# Altium PCB PCB2.PcbDoc
Units mil, origin at the board's own origin, x right, y up, seen from the top; angles counter-clockwise.
Board outline 3895 x 2865 mil, 4 copper layers (Top Layer, VCC, GND, Bottom Layer); 48 components, 105 nets, 303 pads, 159 vias.
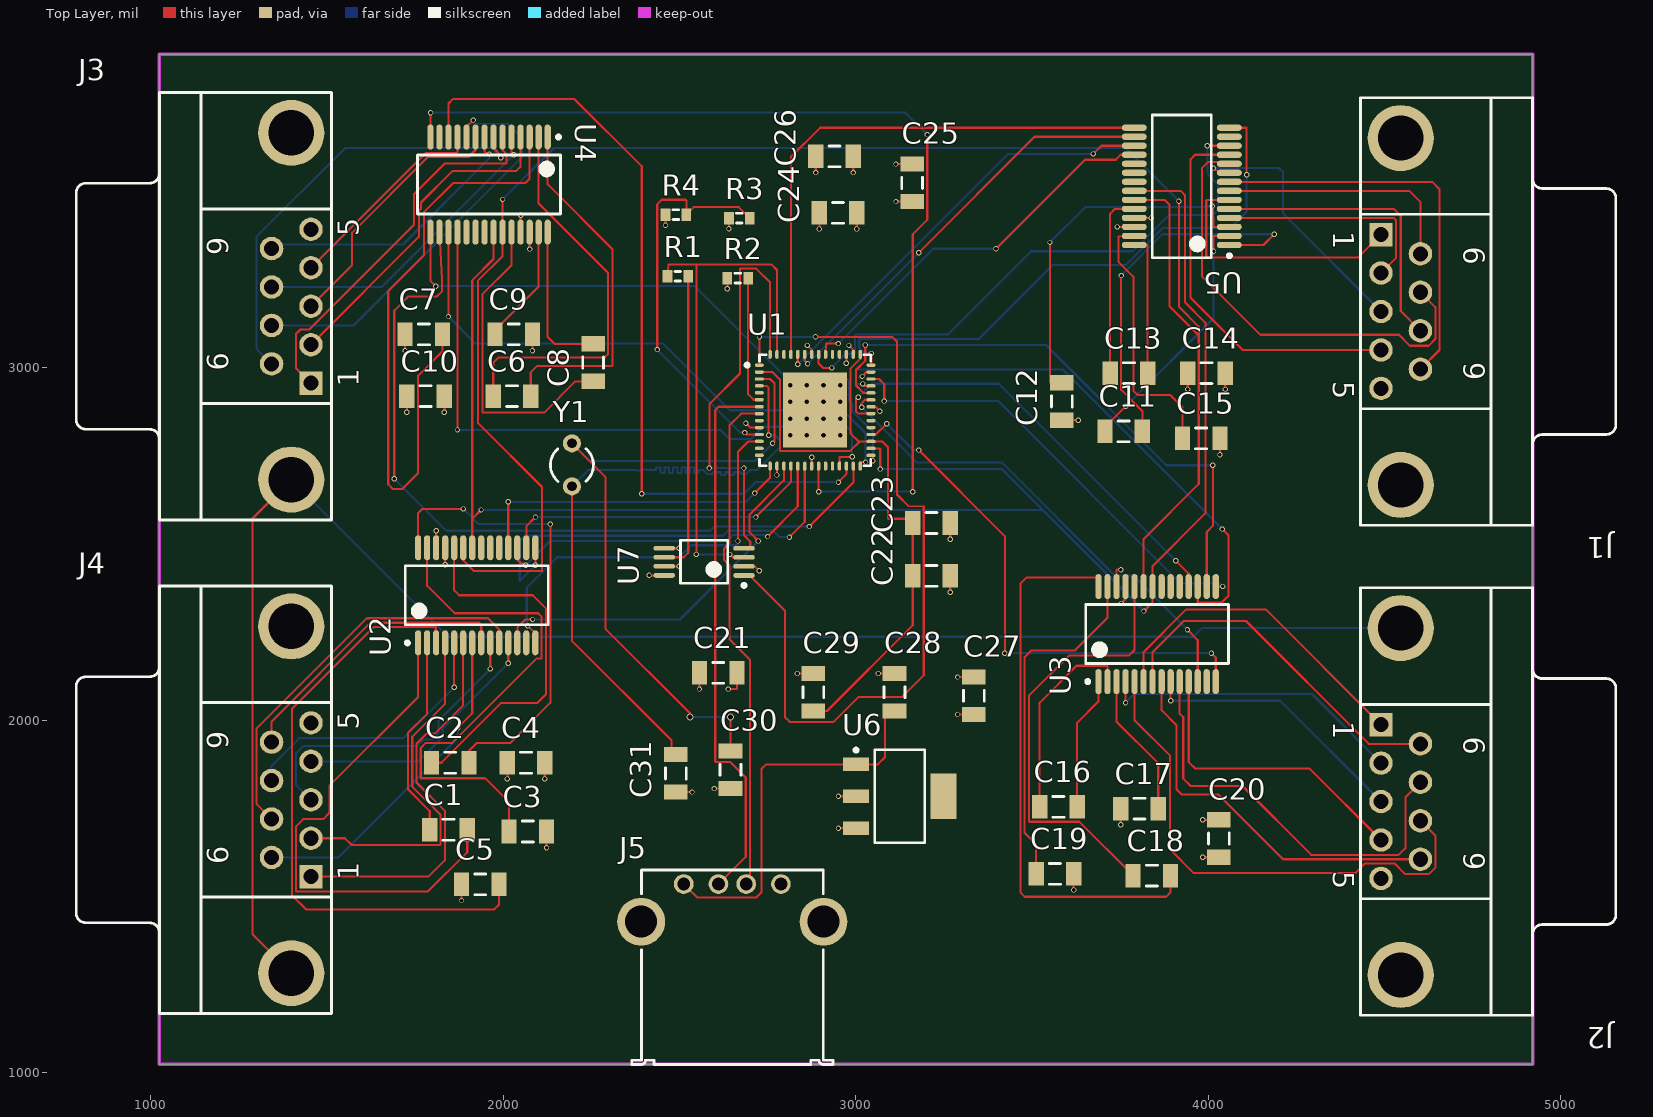
[diagram p0: Top Layer view]
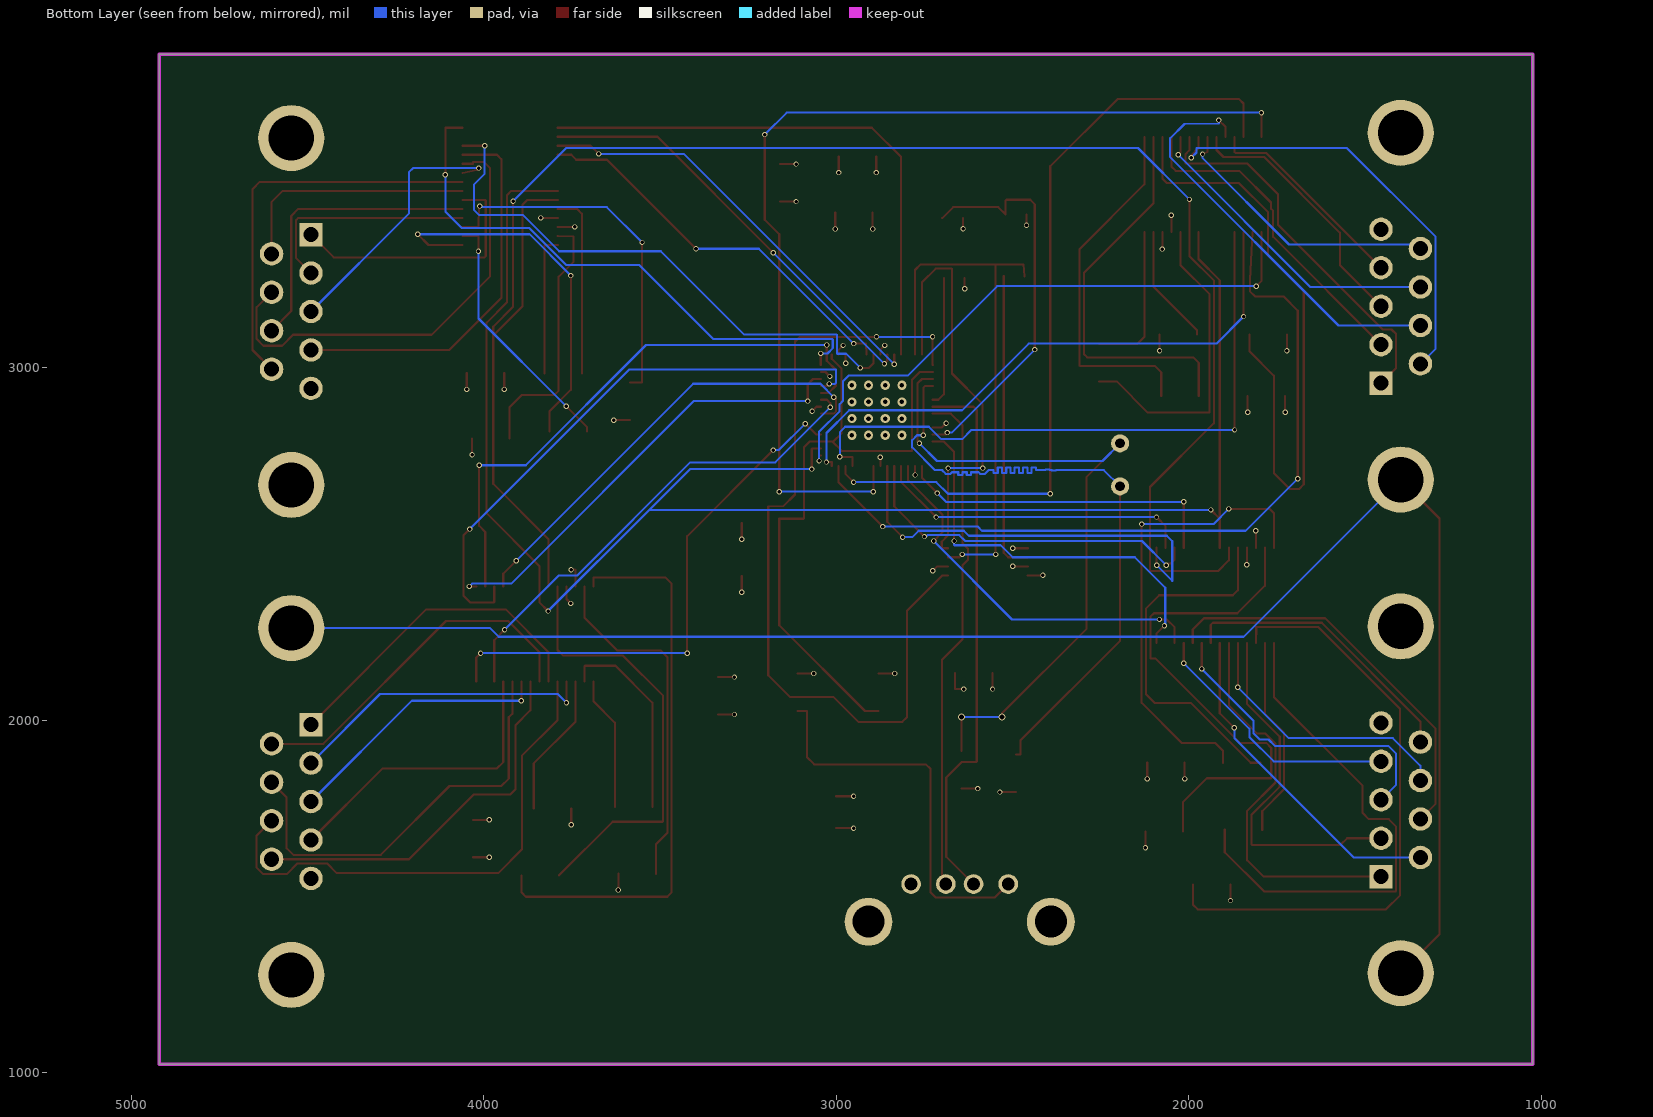
[diagram p1: Bottom Layer view, seen from below]
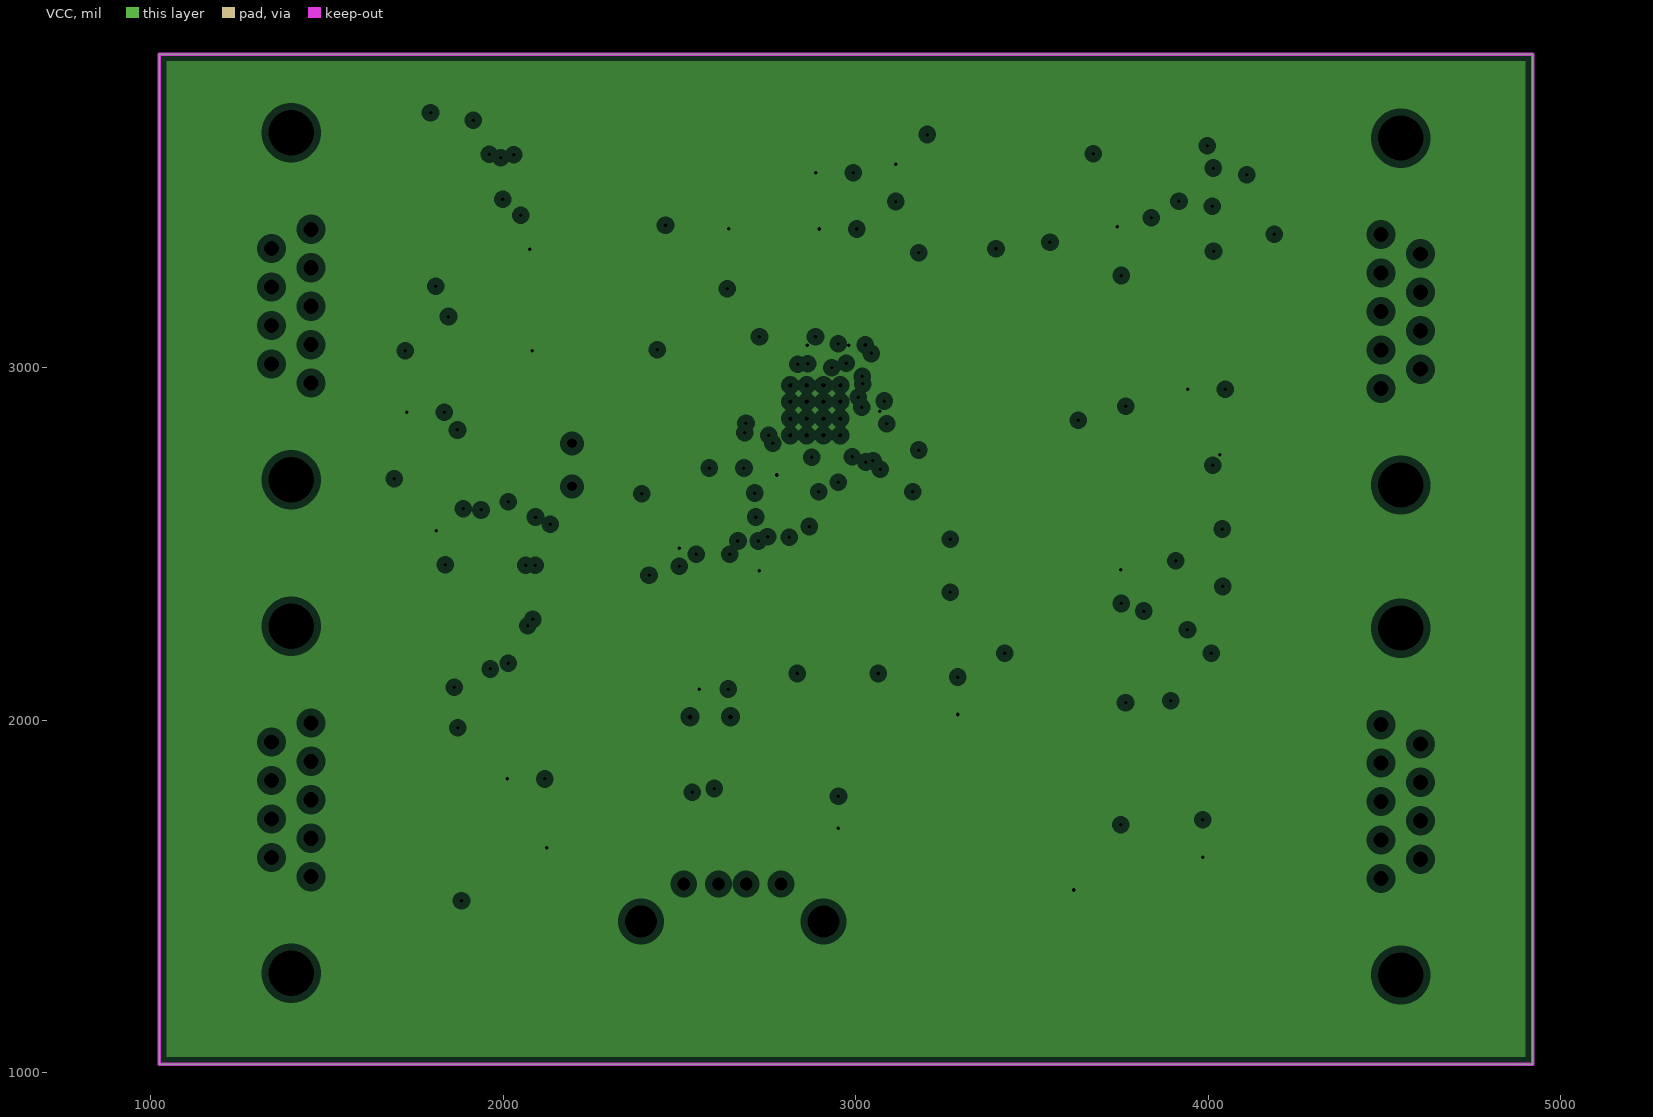
[diagram p2: VCC, clearances drawn from the general rule]
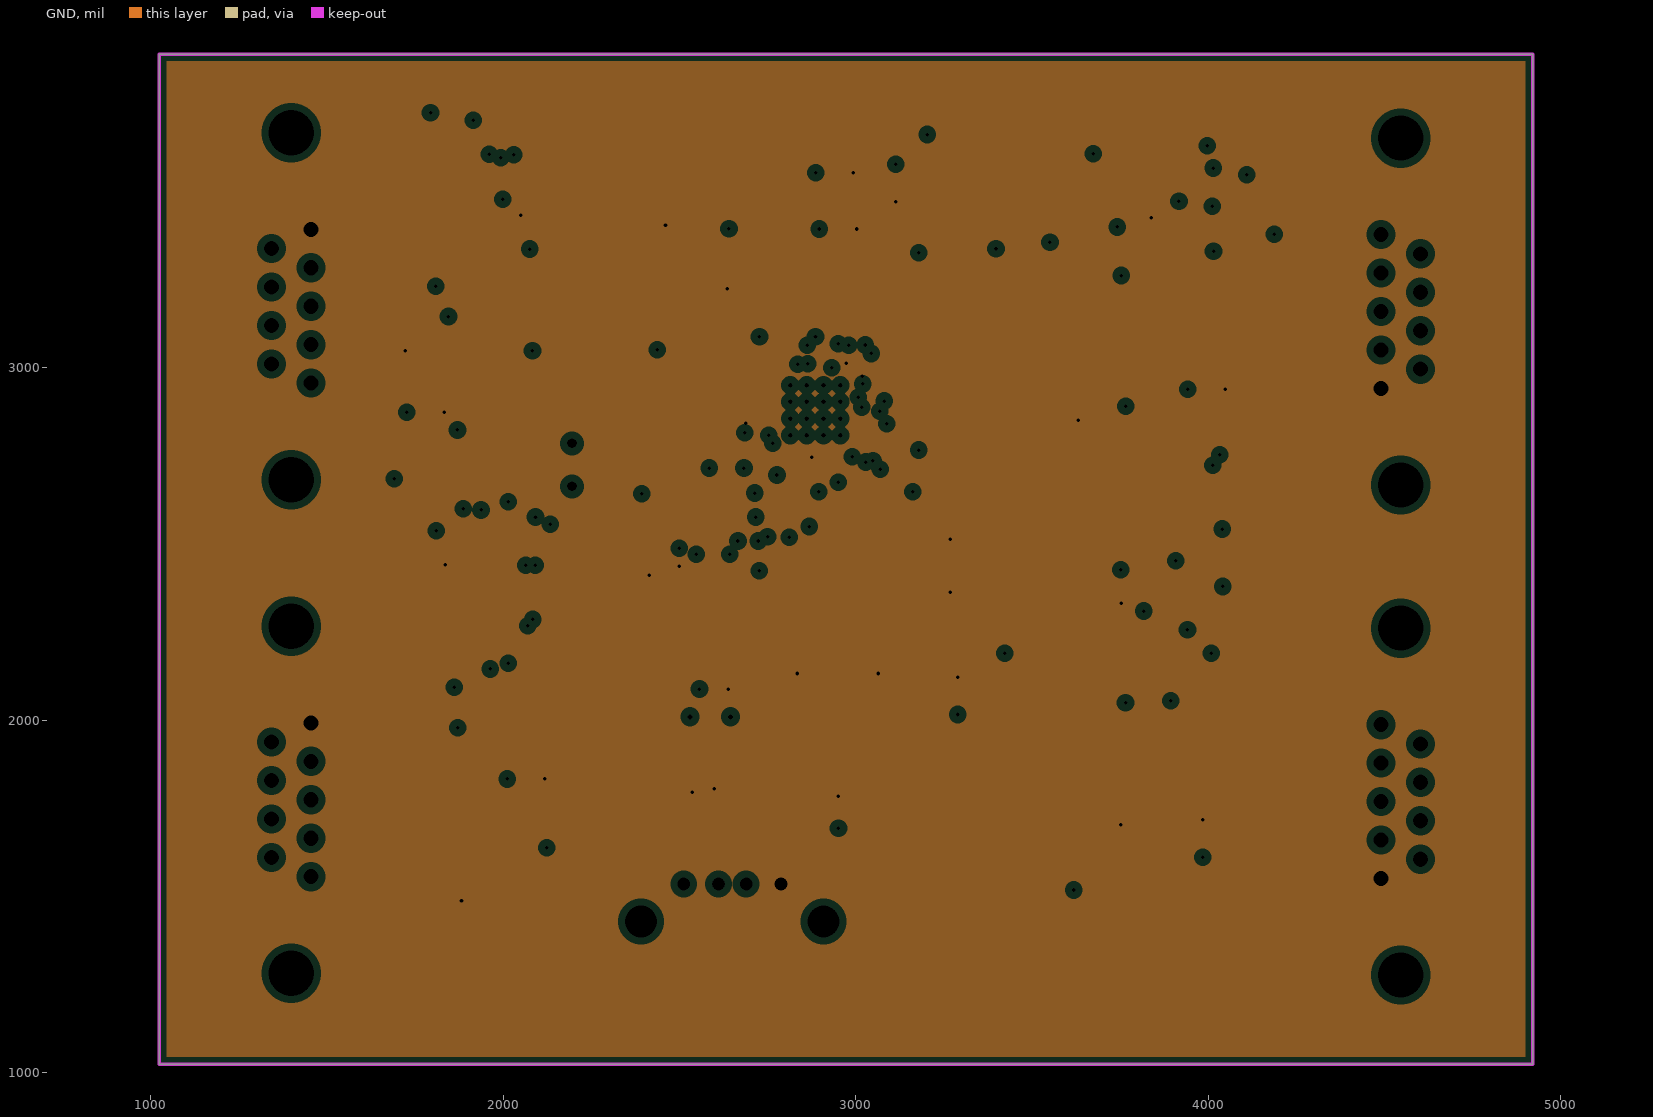
[diagram p3: GND, clearances drawn from the general rule]

## Layer stack, top to bottom
Top Layer: signal copper 1.4
Dielectric: core 12.6, FR-4, Dk 4.8
VCC: plane copper 20, net V3_3
Dielectric: prepreg 12.6, FR-4, Dk 4.8
GND: plane copper 20, net GND
Dielectric: core 12.6, FR-4, Dk 4.8
Bottom Layer: signal copper 1.4

## Board outline
1025,1025 1025,3890 4920,3890 4920,1025

## Design rules (kind name [scope] priority, off if disabled: settings)
Clearance [All] p1: gap=6
DiffPairsRouting [All] p1: maxlimit=50 minlimit=50 mostfreqgap=50 maxuncoupledlength=500
PlaneClearance [All] p1: clearance=20
PlaneConnect [All] p1: planeconnectstyle=Relief reliefexpansion=20 reliefentries=4 reliefconductorwidth=10 reliefairgap=10
PolygonConnect [All] p1: connectstyle=Relief reliefconductorwidth=10 reliefentries=4 polygonreliefangle="90 Angle" airgapwidth=10
RoutingVias [All] p1: holewidth=10 width=15 viastyle="Through Hole" minholewidth=10 minwidth=15 maxholewidth=15 maxwidth=20
SilkscreenOverComponentPads [All] p1: minsilkscreentomaskgap=10
SolderMaskExpansion [All] p1: expansion=4
Width [All] p1: maxlimit=6 minlimit=6 preferedwidth=6
24 further rules are at their usual default settings.

## Classes and differential pairs
differential pair OSC: +OSC_P -OSC_N

## Components (designator, comment, footprint, x,y, rotation, side; value= is the part's Value field where it differs from the comment)
C1 "Cap Semi" CAPC3216L 1845,1690 r0 top
C2 "Cap Semi" CAPC3216L 1850,1880 r0 top
C3 "Cap Semi" CAPC3216L 2070,1685 r0 top
C4 "Cap Semi" CAPC3216L 2065,1880 r0 top
C5 "Cap Semi" CAPC3216L 1935,1535 r0 top
C6 "Cap Semi" CAPC3216L 2025,2920 r0 top
C7 "Cap Semi" CAPC3216L 1775,3095 r0 top
C8 "Cap Semi" CAPC3216L 2255,3015 r90 top
C9 "Cap Semi" CAPC3216L 2030,3095 r0 top
C10 "Cap Semi" CAPC3216L 1780,2920 r0 top
C11 "Cap Semi" CAPC3216L 3760,2820 r0 top
C12 "Cap Semi" CAPC3216L 3585,2905 r90 top
C13 "Cap Semi" CAPC3216L 3775,2985 r0 top
C14 "Cap Semi" CAPC3216L 3995,2985 r0 top
C15 "Cap Semi" CAPC3216L 3980,2800 r0 top
C16 "Cap Semi" CAPC3216L 3575,1755 r0 top
C17 "Cap Semi" CAPC3216L 3805,1750 r0 top
C18 "Cap Semi" CAPC3216L 3840,1560 r0 top
C19 "Cap Semi" CAPC3216L 3565,1565 r0 top
C20 "Cap Semi" CAPC3216L 4030,1665 r90 top
C21 "Cap Semi" CAPC3216L 2610,2135 r0 top
C22 "Cap Semi" CAPC3216L 3215,2410 r180 top
C23 "Cap Semi" CAPC3216L 3215,2560 r180 top
C24 "Cap Semi" CAPC3216L 2950,3440 r180 top
C25 "Cap Semi" CAPC3216L 3160,3525 r90 top
C26 "Cap Semi" CAPC3216L 2940,3600 r180 top
C27 "Cap Semi" CAPC3216L 3335,2070 r90 top
C28 "Cap Semi" CAPC3216L 3110,2080 r90 top
C29 "Cap Semi" CAPC3216L 2880,2080 r90 top
C30 "Cap Semi" CAPC3216L 2645,1860 r90 top
C31 "Cap Semi" CAPC3216L 2490,1850 r90 top
J1 "D Connector 9" DSUB1.385-2H9 4920,3160 r270 top
J2 "D Connector 9" DSUB1.385-2H9 4920,1770 r270 top
J3 "D Connector 9" DSUB1.385-2H9 1025,3175 r90 top
J4 "D Connector 9" DSUB1.385-2H9 1025,1775 r90 top
J5 "61400416021" 61400416021 2650,1300 r0 top
R1 "Res3" RESC1608L 2495.47,3260 r0 top
R2 "Res3" RESC1608L 2665.47,3255 r0 top
R3 "Res3" RESC1608L 2670,3425 r0 top
R4 "Res3" RESC1608L 2490,3435 r0 top
U1 "FT4232H" QFN50P800X800X100-56N 2885,2880 r0 top
U2 "MAX3241" SOP65P780X199-28N 1925,2355 r90 top
U3 "MAX3241" SOP65P780X199-28N 3855,2245 r90 top
U4 "MAX3241" SOP65P780X199-28N 1960,3520 r270 top
U5 "MAX3241" SOP65P780X199-28N 3925,3515 r180 top
U6 "5 to 3_3 converter" SOT230P700X180-4N 3125,1785 r0 top
U7 "93LC46B" TSOP65P640X120-8N 2570,2450 r180 top
Y1 "XTAL" BCY-W2/D3.1 2195,2725 r0 top

## Footprints (in the part's own frame and the unit in brackets; to place one, negate y for a bottom-side part, rotate by r counter-clockwise, add the part's x,y. Pads: shape width x height; smd on the part's side, far side on the other; paste and mask are expansions set on the pad)
61400416021 [mm] "USB 2.0 Type A Horizontal"
  round 1.42 hole 0.92: 1(-3.5,5.99) 2(-1,5.99) 3(1,5.99) 4(3.5,5.99)
  round 3.45 hole 2.3: Shell(-6.57,3.28) Shell(6.57,3.28)
  silkscreen extent -7.25,-7 7.25,7, body extent -8,-7 8,7, height 7.63
BCY-W2/D3.1 [mm] "Crystal, Thru-Hole; 2 Leads; Body 3.1 x 8.2 mm (Dia.xH)"
  round 1.3 hole 0.7: 1(0,1.55) 2(0,-1.55)
  silkscreen extent -1.55,-1.19 1.55,1.17
CAPC3216L [mm] "Chip Capacitor, Body 3.2x1.6mm, IPC High Density"
  rect 1.1x1.7 smd: 1(-1.35,0) 2(1.35,0)
  silkscreen extent -0.4,-0.75 0.4,0.75, body extent -1.7,-0.9 1.7,0.9, height 1.3
DSUB1.385-2H9 [mm] "Connector; D Subminiature; 9 Position; Right Angle; Pitch 1.385 mm"
  rect 1.69x1.69 hole 1.09: 1(-5.54,-10.92)
  round 1.69 hole 1.09: 2(-2.77,-10.92) 3(0,-10.92) 4(2.77,-10.92) 5(5.54,-10.92) 6(-4.155,-8.08) 7(-1.385,-8.08) 8(1.385,-8.08) 9(4.155,-8.08)
  round 4.76 hole 3.26: 10(-12.495,-9.5) 11(12.495,-9.5)
  silkscreen extent -15.4,-12.4 15.4,6
QFN50P800X800X100-56N [mm] "QFN, 56-Leads, Body 8,0x8,0mm (max), Pitch 0,50mm, IPC Medium Density"
  oval 0.65x0.25 smd: 1(-4.025,3.25) 2(-4.025,2.75) 3(-4.025,2.25) 4(-4.025,1.75) 5(-4.025,1.25) 6(-4.025,0.75) 7(-4.025,0.25) 8(-4.025,-0.25) 9(-4.025,-0.75) 10(-4.025,-1.25) 11(-4.025,-1.75) 12(-4.025,-2.25) 13(-4.025,-2.75) 14(-4.025,-3.25) 29(4.025,-3.25) 30(4.025,-2.75) 31(4.025,-2.25) 32(4.025,-1.75) 33(4.025,-1.25) 34(4.025,-0.75) 35(4.025,-0.25) 36(4.025,0.25) 37(4.025,0.75) 38(4.025,1.25) 39(4.025,1.75) 40(4.025,2.25) 41(4.025,2.75) 42(4.025,3.25)
  oval 0.25x0.65 smd: 15(-3.25,-4.025) 16(-2.75,-4.025) 17(-2.25,-4.025) 18(-1.75,-4.025) 19(-1.25,-4.025) 20(-0.75,-4.025) 21(-0.25,-4.025) 22(0.25,-4.025) 23(0.75,-4.025) 24(1.25,-4.025) 25(1.75,-4.025) 26(2.25,-4.025) 27(2.75,-4.025) 28(3.25,-4.025) 43(3.25,4.025) 44(2.75,4.025) 45(2.25,4.025) 46(1.75,4.025) 47(1.25,4.025) 48(0.75,4.025) 49(0.25,4.025) 50(-0.25,4.025) 51(-0.75,4.025) 52(-1.25,4.025) 53(-1.75,4.025) 54(-2.25,4.025) 55(-2.75,4.025) 56(-3.25,4.025)
  rect 4.6x5.4 smd: 57(0,0)
  silkscreen extent -5.02,-4 4,4, body extent -4,-4 4,4, height 1
RESC1608L [mm] "Chip Resistor, Body 1.6x0.8mm, IPC High Density"
  rect 0.7x0.9 smd: 1(-0.75,0) 2(0.75,0)
  silkscreen extent -0.2,-0.35 0.2,0.35, body extent -0.85,-0.48 0.85,0.48, height 0.9
SOP65P780X199-28N [mm] "SOP, 28-Leads, Body 10,3x5,4mm (max), Pitch 0,65mm, IPC Medium Density"
  oval 1.8x0.45 smd: 1(-3.425,4.225) 2(-3.425,3.575) 3(-3.425,2.925) 4(-3.425,2.275) 5(-3.425,1.625) 6(-3.425,0.975) 7(-3.425,0.325) 8(-3.425,-0.325) 9(-3.425,-0.975) 10(-3.425,-1.625) 11(-3.425,-2.275) 12(-3.425,-2.925) 13(-3.425,-3.575) 14(-3.425,-4.225) 15(3.425,-4.225) 16(3.425,-3.575) 17(3.425,-2.925) 18(3.425,-2.275) 19(3.425,-1.625) 20(3.425,-0.975) 21(3.425,-0.325) 22(3.425,0.325) 23(3.425,0.975) 24(3.425,1.625) 25(3.425,2.275) 26(3.425,2.925) 27(3.425,3.575) 28(3.425,4.225)
  silkscreen extent -3.55,-5.15 2.13,5.15, body extent -2.69,-5.17 2.69,5.17, height 1.99
SOT230P700X180-4N [mm] "SOT223, 4-Leads, Body 6,7x7,3mm (max), Pitch 2,30mm, IPC Medium Density"
  rect 1.9x0.95 smd: 1(-3.15,2.3) 2(-3.15,0) 3(-3.15,-2.3)
  rect 1.9x3.3 smd: 4(3.15,0)
  silkscreen extent -3.27,-3.35 1.8,3.45, body extent -1.85,-3.35 1.85,3.35, height 1.8
TSOP65P640X120-8N [mm] "TSOP, 8-Leads, Body 3,1x4,5mm (max), Pitch 0,65mm, IPC Medium Density"
  oval 1.55x0.35 smd: 1(-2.875,0.975) 2(-2.875,0.325) 3(-2.875,-0.325) 4(-2.875,-0.975) 5(2.875,-0.975) 6(2.875,-0.325) 7(2.875,0.325) 8(2.875,0.975)
  silkscreen extent -3,-1.55 1.7,1.82, body extent -2.25,-1.55 2.25,1.55, height 1.2

## Part data
C1 C2 C3 C4 C5 C6 C7 C8 C9 C10 C11 C12 C13 C14 C15 C16 C17 C18 C19 C20 C21 C22 C23 C24 C25 C26 C27 C28 C29 C30 C31: "Capacitor (Semiconductor SIM Model)"
J1 J2 J3 J4: "Receptacle Assembly, 9 Position, Right Angle"
J5: "USB 2.0 Type A Receptacle WR-COM, Horizontal, THT"
R1 R2 R3 R4: "Resistor"
U1: library part Component_1
U2 U3 U4 U5: library part Component_2
U6: library part Component_3
U7: library part Component_4
Y1: "Crystal Oscillator"

## Via types
v1: diameter 15, hole 10, Top Layer to Bottom Layer, 141 vias
v2: diameter 25.98, hole 12.99, Top Layer to Bottom Layer, tented top, 16 vias
v3: diameter 20, hole 15, Top Layer to Bottom Layer, 2 vias

## Nets (pads, with @x,y where several pads share a name; then routed paths per layer and width w, separated by ;. In a path a pad name is that pad's centre, name@x,y a point inside that pad or via, vN(x,y) a via of type N, cw(c..) or ccw(c..) an arc to the next point about the centre after c; other vN are vias at no path point)
CTSA: J4.8 U2.5 | length 777.9
  Top Layer w6: v1(1861.02,2094.56) U2.5
  Bottom Layer w6: J4.8 1343.11,1871.61 1421.5,1950 1716.46,1950 v1(1861.02,2094.56)
CTSB: J3.8 U4.5 | length 895.5
  Top Layer w6: U4.5 2023.98,3610.48 v1(2030.23,3604.23)
  Bottom Layer w6: J3.8 1655.53,3229.53 v1(2030.23,3604.23)
CTSC: J2.8 U3.5 | length 1480.1
  Top Layer w6: U3.5 3791.02,2001 3892,1900.02 3892,1634 3959,1567 4417,1567 4444.16,1594.16 4528.84,1594.16 4559,1564 4625,1564 4645,1584 4645,1672.36 J2.8
CTSD: J1.8 U5.5 | length 843.1
  Top Layer w6: U5.5 4525.98,3451.02 4546,3431 4546,3161.36 J1.8
DCDA: J4.1 U2.6 | length 1117.3
  Top Layer w6: J4.1 1787.89,1556.89 1834.51,1603.51 1834.51,1743.69 1754.19,1824 1754.19,1934 1782.69,1962.5 1805.99,1962.5 1886.61,2043.12 U2.6
DCDB: J3.1 U4.6 | length 1085.3
  Top Layer w6: J3.1 1412,2999.81 1412,3096 1425,3109 1450,3109 1747,3406 1747,3493 1833.5,3579.5 2009,3579.5 2010,3605.39 1998.39,3617 U4.6
DCDC: J2.1 U3.6 | length 942.8
  Top Layer w6: U3.6 3816.61,2194 3937.61,2315 4163.19,2315 J2.1
DCDD: J1.1 U5.6 | length 747.9
  Top Layer w6: U5.6 3996,3476.61 3994.41,3475.02 3994.41,3317.12 3998,3313.53 4425.49,3313.53 J1.1
DSRA: J4.6 U2.7 | length 955.3
  Top Layer w6: v1(1871,1979.31) 1912.2,2020.51 U2.7
  Bottom Layer w6: J4.6 1532.27,1611.42 1871,1950.15 v1(1871,1979.31)
DSRB: J3.6 U4.7 | length 1261.2
  Top Layer w6: U4.7 1972.8,3623.69 1993,3603.49 v1(1993,3596)
  Bottom Layer w6: J3.6 1300,3054.53 1300,3372 1551.66,3623.66 1977,3623.66 1978.16,3622.5 1978.16,3610.84 v1(1993,3596)
DSRC: J2.6 U3.7 | length 1024.3
  Top Layer w6: U3.7 3842.2,2194 3930.2,2282 4107,2282 4455.42,1933.58 J2.6
DSRD: J1.6 U5.7 | length 702.4
  Top Layer w6: U5.7 4570.69,3502.2 4601.89,3471 J1.6
DTRA: J4.4 U2.11 | length 746.4
  Top Layer w6: v1(2014.57,2162.57) U2.11
  Bottom Layer w6: J4.4 1759.56,1884.06 1828.5,1953 1828.5,1976.5 v1(2014.57,2162.57)
DTRB: J3.4 U4.11 | length 593.9
  Top Layer w6: J3.4 1781,3610.14 1868.07,3610.14 1870.43,3612.5 U4.11
DTRC: J2.4 U3.11 | length 865.3
  Top Layer w6: U3.11 3944.57,1881.93 3962.5,1864 4287.02,1864 J2.4
DTRD: J1.4 U5.11 | length 1109.8
  Top Layer w6: U5.11 3962.5,3604.57 3950,3592.07 3950,3198.5 4097.55,3050.95 J1.4
EECLK: U1.56 U7.4 | length 1257.5
  Top Layer w6: v1(2585,2716) 2585,2897 2672,2984 2672,3280.72 2673,3281.72 2718,3281.72 2757.05,3242.67 U1.56 ; v1(2683,2716) 2683,2525 2701,2507 2701,2488.39 U7.4
  Bottom Layer w6: v1(2585,2716) v1(2683,2716)
EECS: U1.1 U7.1 | length 2392.1
  Top Layer w6: U7.1 2698.89,2411.61 2800,2310.5 2800,2008.5 2812.5,1996 2937.5,1996 3007.5,2066 3131,2066 3193,2128 3193,2607 3150,2608 3117,2641 3117,3075 3104,3088 v1(2886,3088) ; U1.1 2727,3007.95 v1(2727,3088)
  Bottom Layer w6: v1(2727,3088) v1(2886,3088)
EEDATA: R1.1 U1.55 U7.3 | length 1549.5
  Top Layer w6: R1.1 2468.66,3293.72 2547,3293.72 ; v1(2548,2471) 2548,3292.72 2547,3293.72 ; v1(2643,2471) 2651.2,2462.8 U7.3 ; U1.55 2776.73,3277.77 2760.78,3293.72 2547,3293.72
  Bottom Layer w6: v1(2548,2471) v1(2643,2471)
GND: C4.2 C5.1 C7.1 C10.2 C12.1 C14.2 C17.1 C20.2 C21.2 C22.1 C23.1 C24.1 C25.1 C26.1 C27.2 C28.2 C29.2 C30.1 C31.1 J1.5 J2.5 J3.5 J4.5 J5.4 R2.1 R4.1 U1.10 U1.21 U1.41 U1.45 U2.25 U3.25 U4.25 U5.25 U6.2 U7.7 U7.8 | length 1415
  Top Layer w6: v1(1721.85,3049.03) C7.1 ; v1(1833.15,2874.03) C10.2 ; v1(1835.43,2441.91) U2.25 ; v1(1881.85,1489.03) C5.1 ; U4.25 v1(2049.57,3433.09) ; v1(2118.15,1834.03) C4.2 ; v1(2413.8,2411.61) U7.8 ; U7.7 v1(2499.82,2437.2) ; v1(2460.47,3404.78) R4.1 ; C31.1 v1(2535.97,1796.85) ; v1(2599.03,1806.85) C30.1 ; v1(2635.94,3224.78) R2.1 ; v1(2638.15,2089.03) 2662,2089.03 2663.15,2090.18 C21.2 ; v1(2688.74,2843.29) 2701.24,2830.79 U1.10 ; v1(2834.03,2133.15) C29.2 ; U1.21 v1(2875.16,2746.83) ; v1(2951.08,1785) U6.2 ; v1(2973.58,3013.17) U1.45 ; v1(2993.15,3554.03) C26.1 ; v1(3003.15,3394.03) C24.1 ; v1(3018.17,2975.77) 3030.67,2988.27 U1.41 ; v1(3064.03,2133.15) C28.2 ; v1(3114.03,3471.85) C25.1 ; v1(3268.15,2364.03) C22.1 ; v1(3268.15,2514.03) C23.1 ; v1(3289.03,2123.15) C27.2 ; C12.1 v1(3630.97,2851.85) ; v1(3751.85,1704.03) C17.1 ; v1(3752.93,2331.91) 3765.43,2344.41 U3.25 ; U5.25 v1(3838.09,3425.43) ; v1(3984.03,1718.15) C20.2 ; v1(4048.15,2939.03) C14.2
NetC1_1: C1.1 U2.2 | length 578.1
  Top Layer w6: U2.2 1784.25,2018.85 1730.19,1964.8 1730.19,1804.36 1791.85,1742.71 C1.1
NetC1_2: C1.2 U2.1 | length 1476.7
  Top Layer w6: U2.1 1758.66,2066 1507,1814.34 1507,1737.5 1489.5,1720 1433,1720 1412.65,1699.65 1412.65,1515.97 1414,1514.62 1786.62,1514.62 1898.15,1626.15 C1.2
NetC2_1: C2.1 U2.24 | length 1050.9
  Top Layer w6: C2.1 1824.66,1880 1994.66,2050 2097.5,2050 2121.2,2073.7 2121.2,2317.8 2084,2355 1875,2355 1861.02,2368.98 U2.24
NetC2_2: C2.2 U2.28 | length 1324.3
  Top Layer w6: U2.28 1758.66,2587.5 1771.16,2600 v1(1887,2600) ; C2.2 1903.15,1914.15 1925,1936 2020,1936 2134,2050 v1(2134,2557)
  Bottom Layer w6: v1(1887,2600) 1930,2557 v1(2134,2557)
NetC3_1: C3.1 U2.27 | length 1481.9
  Top Layer w6: U2.27 1784.25,2382.25 1862.5,2304 2099,2304 2109.2,2293.8 2109.2,2177 2108.2,2176 2095.54,2176 1855.82,1936.27 1780.47,1936.27 1766.19,1922 1766.19,1837 1767.19,1836 1949,1836 2016.85,1768.15 C3.1
NetC5_2: C5.2 U2.3 | length 1745.3
  Top Layer w6: U2.3 1808.84,2265 1633,2265 1400.65,2032.65 1400.65,1503.97 1440.62,1464 1975,1464 1988.15,1477.15 C5.2
NetC6_1: C6.1 U4.2 | length 1127.5
  Top Layer w6: C6.1 1971.85,3014.35 1987.5,3030 2288.51,3030 2297.47,3038.96 2297.47,3269.53 2100.75,3466.25 U4.2
NetC6_2: C6.2 U4.1 | length 1031.3
  Top Layer w6: C6.2 2078.15,2987.5 2095.65,3005 2308,3005 2310,3007 2310,3337 2126.34,3520.66 U4.1
NetC7_2: C7.2 U4.3 | length 1802.3
  Top Layer w6: C7.2 1828.15,3047 1759,2977.85 1759,2702 1713,2656 1687.5,2656 1674,2669.5 1674,3218 1775,3319 1775,3441.14 1858.52,3524.66 2062.5,3524.66 2075.16,3537.32 U4.3
NetC8_1: C8.1 U4.24 | length 896.7
  Top Layer w6: U4.24 2023.98,3292 1941,3209.02 1941,2874 1942,2873 2116.15,2873 2205,2961.85 C8.1
NetC8_2: C8.2 U4.28 | length 434.3
  Top Layer w6: U4.28 2126.34,3087.5 2145.69,3068.15 C8.2
NetC9_1: C9.1 U4.27 | length 341.5
  Top Layer w6: C9.1 1976.85,3107 2100.75,3230.9 U4.27
NetC11_1: C11.1 U5.2 | length 726.1
  Top Layer w6: C11.1 3706.85,2832 v1(3765.96,2891.11) ; v1(4015,3331) 4015,3373.25 4016,3374.25 U5.2
  Bottom Layer w6: v1(3765.96,2891.11) 4015,3140.15 v1(4015,3331)
NetC11_2: C11.2 U5.1 | length 1089.1
  Top Layer w6: v1(3753,3262) 3753,2938 3813.15,2877.85 C11.2 ; U5.1 4156.66,3348.66 v1(4187,3379)
  Bottom Layer w6: v1(3753,3262) 3870,3379 v1(4187,3379)
NetC12_2: C12.2 U5.3 | length 1039.3
  Top Layer w6: v1(3551,3356) 3551,2958.65 C12.2 ; v1(4011,3459) 4014,3456 4015,3399.84 U5.3
  Bottom Layer w6: v1(3551,3356) 3651,3456 4008,3456 v1(4011,3459)
NetC13_1: C13.1 U5.24 | length 526.4
  Top Layer w6: C13.1 3721.85,3437.5 3735.37,3451.02 U5.24
NetC13_2: C13.2 U5.28 | length 401
  Top Layer w6: U5.28 3827,3348.66 3828.15,3347.51 C13.2
NetC15_1: C15.1 U5.27 | length 747.9
  Top Layer w6: U5.27 3745,3373.25 3745,3301 3787.5,3258.5 3787.5,2935.5 3800,2923 3892.5,2923 3926.85,2888.65 C15.1
NetC16_1: C16.1 U3.2 | length 575.5
  Top Layer w6: C16.1 3521.85,2050.64 3626.21,2155 3713.25,2155 3714.25,2154 U3.2
NetC16_2: C16.2 U3.1 | length 380.2
  Top Layer w6: C16.2 3628.15,1993.49 3688.66,2054 U3.1
NetC17_2: C17.2 U3.3 | length 409.2
  Top Layer w6: U3.3 3739.84,1996.59 3858.15,1878.28 C17.2
NetC18_1: C18.1 U3.24 | length 1249
  Top Layer w6: C18.1 3634.32,1712.53 3492.66,1712.53 3491.19,1714 3491.19,2070.12 3605.07,2184 3775.02,2184 3791.02,2200 U3.24
NetC18_2: C18.2 U3.28 | length 1614.5
  Top Layer w6: U3.28 3688.66,2406 3485.5,2406 3467,2387.5 3467,1512.5 3479.5,1500 3880.65,1500 3893.15,1512.5 C18.2
NetC19_1: C19.1 U3.27 | length 998.3
  Top Layer w6: C19.1 3511.85,1648.15 3479.19,1680.81 3479.19,2179.89 3497.73,2198.43 3621.68,2198.43 3714.25,2291 U3.27
NetC28_1: C28.1 J5.1 U6.1 | length 1114.2
  Top Layer w6: J5.1 2550.03,1498 2718.5,1498 2733,1512.5 2733,1862.5 2746.05,1875.55 U6.1 3062.5,1875.55 3083,1896.05 3083,2026.85 C28.1
NetJ5_2: J5.2 U1.7 | length 1565.2
  Top Layer w6: J5.2 2688,1613.2 2688,1838 2644,1882 2603,1882 2601.68,1883.32 2601.68,2880.52 2611,2889.84 U1.7
NetJ5_3: J5.3 U1.8 | length 1440.7
  Top Layer w6: J5.3 2700,1546.46 2700,2172 2642,2230 2642,2440.34 2626.5,2455.84 2626.5,2487.5 2642,2503 2642,2836.91 2675.25,2870.16 U1.8
NetR1_2: R1.2 U7.6 | length 858.1
  Top Layer w6: U7.6 2512.5,2462.8 2525,2475.3 R1.2
NetR2_2: R2.2 U1.6 | length 367.9
  Top Layer w6: R2.2 2695,2925 2710.47,2909.53 U1.6
NetR3_2: R3.2 R4.2 U1.11 | length 1131.6
  Top Layer w6: v1(2437,3052) 2437,3464 2450,3477 2517.53,3477 2519.53,3475 R4.2 2540.53,3456 2668.53,3456 R3.2 ; v1(2685,2816.5) 2690.4,2811.1 U1.11
  Bottom Layer w6: v1(2437,3052) 2672.5,2816.5 v1(2685,2816.5)
OSC_N: C31.2 U1.4 Y1.2 | length 1957.7
  Top Layer w6: Y1.2 2195,2226 2478,1943 2478,1903.15 C31.2 ; U1.4 2748,2948.9 2753,2943.9 v1(2753,2809)
  Bottom Layer w6: Y1.2 2241.02,2710 2295,2710 2300,2710 2312,2710.01 2324,2710 2330,2710 2340,2710 2352,2710.01 2364,2710 2370,2710 2377,2710 2377,2709.5 2389,2709.5 2389,2710 2395,2710 2395,2712 2407,2712 2407,2710 2419,2710 2425,2710 2434,2710 2434,2718 2446,2718 2446,2710 2446,2702 2458,2702 2458,2710 2458,2718 2470,2718 2470,2710 2470,2702 2482,2702 2482,2710 2482,2718 2494,2718 2494,2710 2494,2702 2506,2702 2506,2710 2506,2718 2518,2718 2518,2710 2518,2702 2530,2702 2530,2710 2530,2718 2542,2718 2542,2710 2542,2702 2554,2702 2554,2710 2560,2710 2568.5,2710 2568.5,2709.17 2578.17,2699.5 2591.83,2699.5 2596.33,2704 2606,2704 2618,2704 2618,2696 2630,2696 2630,2704 2642,2704 2642,2696 2654,2696 2654,2704 2660,2704 2671.67,2704 2676.17,2699.5 2689.83,2699.5 2699.5,2709.17 2699.5,2710 2720,2710 2785,2775 2785,2795 2771,2809 v1(2753,2809)
OSC_P: C30.2 U1.3 Y1.1 | length 1957.7
  Top Layer w6: Y1.1 2290,2691.02 2290,2260 2530,2020 v3(2530,2010) ; C30.2 v3(2645,2010) ; U1.3 2757,2968.58 2769.5,2956.08 2769.5,2791.27 v1(2764.26,2786.02)
  Bottom Layer w6: Y1.1 2245.02,2736 2295,2736 2300,2736 2352,2736 2364,2736 2568.5,2736 2714.23,2736 v1(2764.26,2786.02) ; v3(2530,2010) v3(2645,2010)
PWREN#: U2.23 U3.23 U4.23 U5.23 | length 5162.2
  Top Layer w6: U2.23 1886.61,2454.39 1917.5,2423.5 2109,2423.5 2110,2424.5 2110,2662 1929,2843 1929,3248.23 1998.39,3317.62 U4.23 v1(1998.39,3477.9) ; U5.23 3875.89,3476.61 3890,3462.5 3890,3175 3973,3092 ; U3.23 3816.61,2514.61 3973,2671 3973,3092 ; v1(3917,3473) 3917,3173 3973,3117 3973,3092
  Bottom Layer w6: v1(1998.39,3477.9) 2144.1,3623.62 3766.38,3623.62 v1(3917,3473)
RIA: J4.9 U2.8 | length 822.6
  Top Layer w6: J4.9 1343.11,1997.11 1623,2277 1931.93,2277 1937.8,2271.14 U2.8
RIB: J3.9 U4.8 | length 793.3
  Top Layer w6: U4.8 1947.2,3612 v1(1961,3606.5)
  Bottom Layer w6: J3.9 1354.53,3350 1716,3350 1961,3595 v1(1961,3606.5)
RIC: J2.9 U3.8 | length 1096.8
  Top Layer w6: U3.8 3867.8,2029 3910,1986.8 3910,1805 3925,1790 4028.42,1790 4212,1606.42 J2.9
RID: J1.9 U5.8 | length 1137.9
  Top Layer w6: U5.8 4635.2,3527.8 4656.16,3506.84 4656.16,3050.69 J1.9
RTSA: J4.7 U2.10 | length 1143.3
  Top Layer w6: J4.7 1300.84,1762.74 1300.84,1977.57 1613.27,2290 1957,2290 1988.98,2258.02 U2.10
RTSB: J3.7 U4.10 | length 1182
  Top Layer w6: U4.10 1896.02,3684.02 v1(1915,3703)
  Bottom Layer w6: J3.7 1575.47,3120.47 2052.98,3597.98 2052.98,3651.52 2012.5,3692 1915,3693 v1(1915,3703)
RTSC: J2.7 U3.10 | length 1211.5
  Top Layer w6: U3.10 3918.98,2019 3929,2008.98 3929,1835 3950,1814 4097,1814 4292.32,1618.68 4540.18,1618.68 4559,1637.5 4559,1781.64 J2.7
RTSD: J1.7 U5.10 | length 1298.1
  Top Layer w6: U5.10 4030.41,3578.98 4030.41,3583.82 3999,3583.82 3982,3566.82 3982,3260 4148,3094 4541,3094 4572,3063 4625,3063 4644.16,3082.16 4644.16,3172.26 J1.7
RXDA: J4.2 U2.4 | length 1019.3
  Top Layer w6: J4.2 1551.06,1665.94 1570,1647 1820.51,1647 1822.51,1649 1822.51,1732 1742.19,1812.31 1742.19,1953.87 1835.43,2047.11 U2.4
RXDB: J3.2 U4.4 | length 941
  Top Layer w6: J3.2 1761,3372.02 1761,3445.7 1767,3451.7 1767,3469.2 1856.86,3559.05 2037.5,3559.05 2049.57,3571.12 U4.4
RXDC: J2.2 U3.4 | length 876.3
  Top Layer w6: v1(3765.43,2050) U3.4
  Bottom Layer w6: v1(3765.43,2050) 3790.43,2075 4294.13,2075 J2.2
RXDD: J1.2 U5.4 | length 642.6
  Top Layer w6: U5.4 4525.94,3425.43 4532.35,3419.03 4532.35,3311.32 J1.2
SHIELD: J2.10 J3.10 J4.10 | length 4832.9
  Top Layer w6: J4.10 1288.84,1393.24 1288.84,2572.9 J3.10
  Bottom Layer w6: J3.10 1844.59,2237.5 3957.5,2237.5 3981.93,2261.93 J2.10
SUSPEND#: U1.30 U2.22 U3.22 U4.22 U5.22 | length 4972.9
  Top Layer w6: U2.22 1912.2,2572 ; v1(1937.2,2597) 1912.2,2572 ; U4.22 1972.8,3309 1912.2,3248.41 1912.2,2572 ; U1.30 3068.03,2771.73 3069.76,2770 v1(3069.76,2713) ; U5.22 3921.8,3502.2 3934,3490 3934,3186 3992,3128 3992,2587.8 3842.2,2438 U3.22 3842.2,2335 v1(3817.6,2310.4)
  Bottom Layer w6: v1(1937.2,2597) 3531,2597 ; v1(3069.76,2713) 3415,2713 3531,2597 ; v1(3817.6,2310.4) 3531,2597
TTL_CTSA: U1.15 U2.18 | length 934.3
  Top Layer w6: U2.18 v1(2014.57,2620) ; v1(2714,2645) 2757.05,2688.05 U1.15
  Bottom Layer w6: v1(2014.57,2620) 2689,2620 v1(2714,2645)
TTL_CTSB: U1.25 U4.18 | length 1843.8
  Top Layer w6: v1(1870.43,2824) U4.18 ; U1.25 2953.9,2747 v1(2990,2748)
  Bottom Layer w6: v1(1870.43,2824) 2617,2824 2642.98,2798.02 2702.52,2798.02 2737.5,2833 2975,2833 2990,2818 v1(2990,2748)
TTL_CTSC: U1.35 U3.18 | length 1301.7
  Top Layer w6: v1(3007,2917) 3000.5,2910.5 3000.5,2876.66 3007,2870.16 U1.35 ; v1(3908,2453) 3944.57,2416.43 U3.18
  Bottom Layer w6: v1(3007,2917) 3045,2955 3406,2955 v1(3908,2453)
TTL_CTSD: U1.48 U5.18 | length 1127
  Top Layer w6: U1.48 2915.53,3069 v1(2950.5,3069) ; v1(3398,3338) 3650.5,3590.5 3737.68,3590.5 3751.75,3604.57 U5.18
  Bottom Layer w6: v1(2950.5,3069) 3219.5,3338 v1(3398,3338)
TTL_DCDA: U1.19 U2.17 | length 1023
  Top Layer w6: U2.17 2040.16,2456 2050.75,2445.41 2058.59,2445.41 v1(2064,2440) ; v1(2750,2521.5) 2835.79,2607.29 U1.19
  Bottom Layer w6: v1(2064,2440) 2133,2509 2634.5,2509 2651,2525.5 2740.5,2525.5 2744.5,2521.5 v1(2750,2521.5)
TTL_DCDB: U1.28 U4.17 | length 1668.4
  Top Layer w6: v1(1844.84,3145.66) U4.17 ; U1.28 3012.95,2733 v1(3028,2733)
  Bottom Layer w6: v1(1844.84,3145.66) 1921.5,3069 2454,3069 2643,2880 2963.5,2880 3028,2815.5 v1(3028,2733)
TTL_DCDC: U1.39 U3.17 | length 1645.6
  Top Layer w6: v1(3020,2954.5) 3025.6,2948.9 U1.39 ; U3.17 3970.16,2336 3971.16,2335 4039,2335 4057.5,2353.5 4057.5,2525.5 v1(4040,2543)
  Bottom Layer w6: v1(3020,2954.5) 3004.42,2954.5 3001,2957.92 3001,2994.5 3002,2995.5 3587.5,2995.5 v1(4040,2543)
TTL_DCDD: U1.52 U5.17 | length 1239.7
  Top Layer w6: v1(2835.79,3010) U1.52 ; v1(3674,3607) 3697.16,3630.16 U5.17
  Bottom Layer w6: v1(2835.79,3010) 3432.79,3607 v1(3674,3607)
TTL_DSRA: U1.18 U2.16 | length 908.8
  Top Layer w6: U2.16 2065.75,2551 v1(2091.75,2577) ; v1(2717,2577) 2816.1,2676.1 U1.18
  Bottom Layer w6: v1(2091.75,2577) v1(2717,2577)
TTL_DSRB: U1.27 U4.16 | length 2269.7
  Top Layer w6: v1(1691,2686) 1691,3162.5 1731.5,3203 1812.5,3203 1826,3216.5 1826,3249.25 U4.16 ; v1(2868.5,2550) 2993.27,2674.77 U1.27
  Bottom Layer w6: v1(1691,2686) 1839,2538 2587,2538 2599,2550 v1(2868.5,2550)
TTL_DSRC: U1.38 U3.16 | length 1655.4
  Top Layer w6: v1(3027,3065) 3027,3020 3001,2994 3001,2950 3021.79,2929.21 U1.38 ; U3.16 3995.75,2534.75 4013,2552 v1(4013,2724)
  Bottom Layer w6: v1(3027,3065) 3540,3065 3881,2724 v1(4013,2724)
TTL_DSRD: U1.51 U5.16 | length 1223.1
  Top Layer w6: U1.51 2855.47,3020.06 v1(2863.53,3012) ; v1(3178.53,3327) 3507.28,3655.75 U5.16
  Bottom Layer w6: v1(2863.53,3012) v1(3178.53,3327)
TTL_DTRA: U1.17 U2.12 | length 1092.4
  Top Layer w6: U2.12 2040.16,2264 2062.66,2286.5 v1(2083.5,2286.5) ; v1(2724,2509) 2699,2534 2699,2584 2796.42,2681.42 U1.17
  Bottom Layer w6: v1(2083.5,2286.5) 2501.5,2286.5 v1(2724,2509)
TTL_DTRB: U1.26 U4.12 | length 2283
  Top Layer w6: U4.12 1844.84,3750 1857.34,3762.5 2202.5,3762.5 2393,3572 v1(2393,2643) ; v1(2951,2676) 2973.58,2698.58 U1.26
  Bottom Layer w6: v1(2393,2643) 2683,2643 2716,2676 v1(2951,2676)
TTL_DTRC: U1.37 U3.12 | length 1386.7
  Top Layer w6: v1(3017,2888) 3017,2900 3026.53,2909.53 U1.37 ; v1(3941,2257) 3970.16,2227.84 U3.12
  Bottom Layer w6: v1(3017,2888) 3173,2732 3414,2732 3735,2411 3787,2411 v1(3941,2257)
TTL_DTRD: U1.49 U5.12 | length 1637.3
  Top Layer w6: U1.49 2894.84,3012.5 2907.34,3000 v1(2932,3000) ; v1(3997.41,3630.16) U5.12
  Bottom Layer w6: v1(2932,3000) 2972,3040 2997,3040 2998,3041 2998,3093.52 2999,3094.52 3261.52,3094.52 3498,3331 3786,3331 3888.5,3433.5 4012.5,3433.5 4028,3449 4028,3519.91 3997.41,3550.5 v1(3997.41,3630.16)
TTL_RIA: U1.20 U2.15 | length 1228.9
  Top Layer w6: v1(2091.34,2440.34) U2.15 ; v1(2812,2520) 2855.47,2563.47 U1.20
  Bottom Layer w6: v1(2091.34,2440.34) 2047,2396 2047,2508.5 2062.5,2524 2624,2524 2638,2538 2766.5,2538 2784.5,2520 v1(2812,2520)
TTL_RIB: U1.29 U4.15 | length 1719.4
  Top Layer w6: U4.15 1793.66,3247.34 v1(1809,3232) ; U1.29 3049,2752.05 v1(3049,2736)
  Bottom Layer w6: v1(1809,3232) 2543.49,3232 2797.49,2978 2965.5,2978 2981,2962.5 2981,2906.5 2990.5,2897 2990.5,2877 3049,2818.5 v1(3049,2736)
TTL_RIC: U1.40 U3.15 | length 1289
  Top Layer w6: U1.40 3066,2968.58 3081,2953.58 v1(3081,2906) ; U3.15 4021.34,2380 v1(4041,2380)
  Bottom Layer w6: v1(3081,2906) 3404,2906 3922,2388 4033,2388 v1(4041,2380)
TTL_RID: U1.53 U5.15 | length 1568.2
  Top Layer w6: U1.53 2816.1,3598.1 2899.34,3681.34 U5.15
TTL_RTSA: U2.13
TTL_RTSB: U4.13
TTL_RTSC: U3.13
TTL_RTSD: U5.13
TTL_RXDA: U1.13
TTL_RXDB: U1.23
TTL_RXDC: U1.33
TTL_RXDD: U1.46
TTL_TXDA: U1.12 U2.14 | length 1152.5
  Top Layer w6: v1(2069.34,2269) 2091.34,2247 U2.14 ; v1(2666,2509) 2666,2762 2695.42,2791.42 U1.12
  Bottom Layer w6: v1(2069.34,2269) 2067,2271.34 2067,2376.5 2153.5,2463 2500,2463 2534,2497 2665,2497 2666,2498 v1(2666,2509)
TTL_TXDB: U1.22 U4.14 | length 2873.7
  Top Layer w6: U4.14 1793.66,3723.66 v1(1794,3724) ; v1(2894.84,2649) U1.22 ; v1(3162,2649) 3162,3379 3203,3420 v1(3203,3662)
  Bottom Layer w6: v1(1794,3724) 3141,3724 v1(3203,3662) ; v1(2894.84,2649) v1(3162,2649)
TTL_TXDC: U1.32 U3.14 | length 1528.4
  Top Layer w6: U1.32 3057.1,2811.1 v1(3088,2842) ; v1(3179,2767) 3423,2523 v1(3423,2191) ; v1(4009,2191) 4021.34,2178.66 U3.14
  Bottom Layer w6: v1(3088,2842) 3163,2767 v1(3179,2767) ; v1(3423,2191) v1(4009,2191)
TTL_TXDD: U1.42 U5.14 | length 1634.4
  Top Layer w6: U1.42 3044,3007.95 v1(3044,3041) ; U5.14 4108,3681.34 4109,3680.34 v1(4109,3548)
  Bottom Layer w6: v1(3044,3041) 3025,3041 3010,3056 3010,3081 3011,3082 3349,3082 3559,3292 3766,3292 3871,3397 4062.5,3397 4109,3443.5 v1(4109,3548)
TXDA: J4.3 U2.9 | length 894.6
  Top Layer w6: v1(1963.39,2146) U2.9
  Bottom Layer w6: J4.3 1412,1817.92 1412,1906 1434,1928 1756,1928 1774,1946 1799,1946 1816.5,1963.5 1816.5,1999.11 v1(1963.39,2146)
TXDB: J3.3 U4.9 | length 740.6
  Top Layer w6: J3.3 1571.77,3291.85 1571.77,3383.34 1786.57,3598.14 1901.73,3598.14 1921.61,3618.02 U4.9
TXDC: J2.3 U3.9 | length 769.3
  Top Layer w6: v1(3893.39,2056) U3.9
  Bottom Layer w6: v1(3893.39,2056) 4204.08,2056 J2.3
TXDD: J1.3 U5.9 | length 762.2
  Top Layer w6: v1(4014,3567) 4020,3561 U5.9
  Bottom Layer w6: v1(4014,3567) 4200,3567 4212.5,3554.5 4212.5,3437.58 J1.3
V1_8: C22.2 C23.2 C29.1 U1.2 U1.31 U1.43 | length 1821.9
  Top Layer w6: U1.2 2763.73,2988.27 2785,2967 2785,2765.7 2786,2764.7 2985,2764.7 3011.72,2791.42 ; C29.1 2918.7,2026.85 3161.85,2270 C22.2 C23.2 3161.85,2572 3093,2572 3092,2573 3092,2774.42 3075,2791.42 U1.31 3011.72,2791.42 ; U1.43 3012.95,3025.95 2985,2998 2985,2814.87 3008.45,2791.42 3011.72,2791.42
V3_3: C3.2 C4.1 C9.2 C10.1 C14.1 C15.2 C19.2 C20.1 C21.1 C24.2 C25.2 C26.2 C27.1 R3.1 U1.16 U1.36 U1.44 U1.50 U2.26 U3.26 U4.26 U5.26 U6.3 U7.2 U7.5 | length 1089.2
  Top Layer w6: v1(1726.85,2874.03) C10.1 ; U2.26 v1(1809.84,2537.78) ; v1(2011.85,1834.03) C4.1 ; v1(2075.16,3337.22) U4.26 ; v1(2083.15,3049.03) C9.2 ; v1(2123.15,1639.03) C3.2 ; U7.5 v1(2499.82,2488.39) ; v1(2556.85,2089.03) C21.1 ; v1(2640.47,3394.78) R3.1 ; U7.2 2713.7,2437.2 v1(2726.2,2424.7) ; v1(2776.73,2696.24) U1.16 ; v1(2862.66,3063.76) 2875.16,3051.26 U1.50 ; v1(2886.85,3554.03) C26.2 ; v1(2896.85,3394.03) C24.2 ; v1(2951.08,1694.45) U6.3 ; v1(2980.77,3063.76) 2993.27,3051.26 U1.44 ; U1.36 3056.26,2889.84 v1(3068.76,2877.34) ; v1(3114.03,3578.15) C25.2 ; v1(3289.03,2016.85) C27.1 ; v1(3618.15,1519.03) C19.2 ; U3.26 3739.84,2426.62 3741,2427.78 v1(3752.34,2427.78) ; v1(3742.22,3399.84) U5.26 ; v1(3941.85,2939.03) C14.1 ; v1(3984.03,1611.85) C20.1 ; v1(4033.15,2754.03) C15.2
pads on no net: J1.10 J1.11 J2.11 J3.11 J4.11 J5.Shell U1.5 U1.9 U1.14 U1.24 U1.34 U1.47 U1.54 U1.57 U2.19 U2.20 U2.21 U3.19 U3.20 U3.21 U4.19 U4.20 U4.21 U5.19 U5.20 U5.21 U6.4
copper on no net:
  other v2: 2814.13,2809.13 2861.38,2809.13 2908.62,2809.13 2955.87,2809.13 2814.13,2856.38 2861.38,2856.38 2908.62,2856.38 2955.87,2856.38 2814.13,2903.62 2861.38,2903.62 2908.62,2903.62 2955.87,2903.62 2814.13,2950.87 2861.38,2950.87 2908.62,2950.87 2955.87,2950.87

## Polygon pours and split planes (outlines as drawn)
V3_3 on VCC (split plane): 4899.9,1045.1 1045.1,1045.1 1045.1,3869.9 4899.9,3869.9
GND on GND (split plane): 4899.9,1045.1 1045.1,1045.1 1045.1,3869.9 4899.9,3869.9

## Keep-outs
Keep-Out Layer:
  the board outline again, w10

## Text inside footprints (layer, text, board x,y; h text height)
J1: Top Overlay "6" at 4724.13,3343.27 h59.06 r270; Top Overlay "9" at 4724.13,3016.1 h59.06 r270; Top Overlay "5" at 4354.06,2961.57 h59.06 r270; Top Overlay "1" at 4354.06,3387.95 h59.06 r270
J2: Top Overlay "6" at 4724.13,1953.27 h59.06 r270; Top Overlay "9" at 4724.13,1626.1 h59.06 r270; Top Overlay "5" at 4354.06,1571.57 h59.06 r270; Top Overlay "1" at 4354.06,1997.95 h59.06 r270
J3: Top Overlay "6" at 1220.87,2991.73 h59.06 r90; Top Overlay "9" at 1220.87,3318.9 h59.06 r90; Top Overlay "5" at 1590.94,3373.43 h59.06 r90; Top Overlay "1" at 1590.94,2947.05 h59.06 r90
J4: Top Overlay "6" at 1220.87,1591.73 h59.06 r90; Top Overlay "9" at 1220.87,1918.9 h59.06 r90; Top Overlay "5" at 1590.94,1973.43 h59.06 r90; Top Overlay "1" at 1590.94,1547.05 h59.06 r90
J5: Mechanical 2 "PCB Edge" at 2563.39,976.38 h32